# Altium PCB PCB.PcbDoc (part 2 of 2)
Units mil, origin at the board's own origin, x right, y up, seen from the top; angles counter-clockwise.
Board outline 2112 x 1014.5 mil, 4 copper layers (Top Layer, Layer 1, Layer 2, Bottom Layer), stack 36.268 mil thick; 50 components, 39 nets, 226 pads, 302 vias.
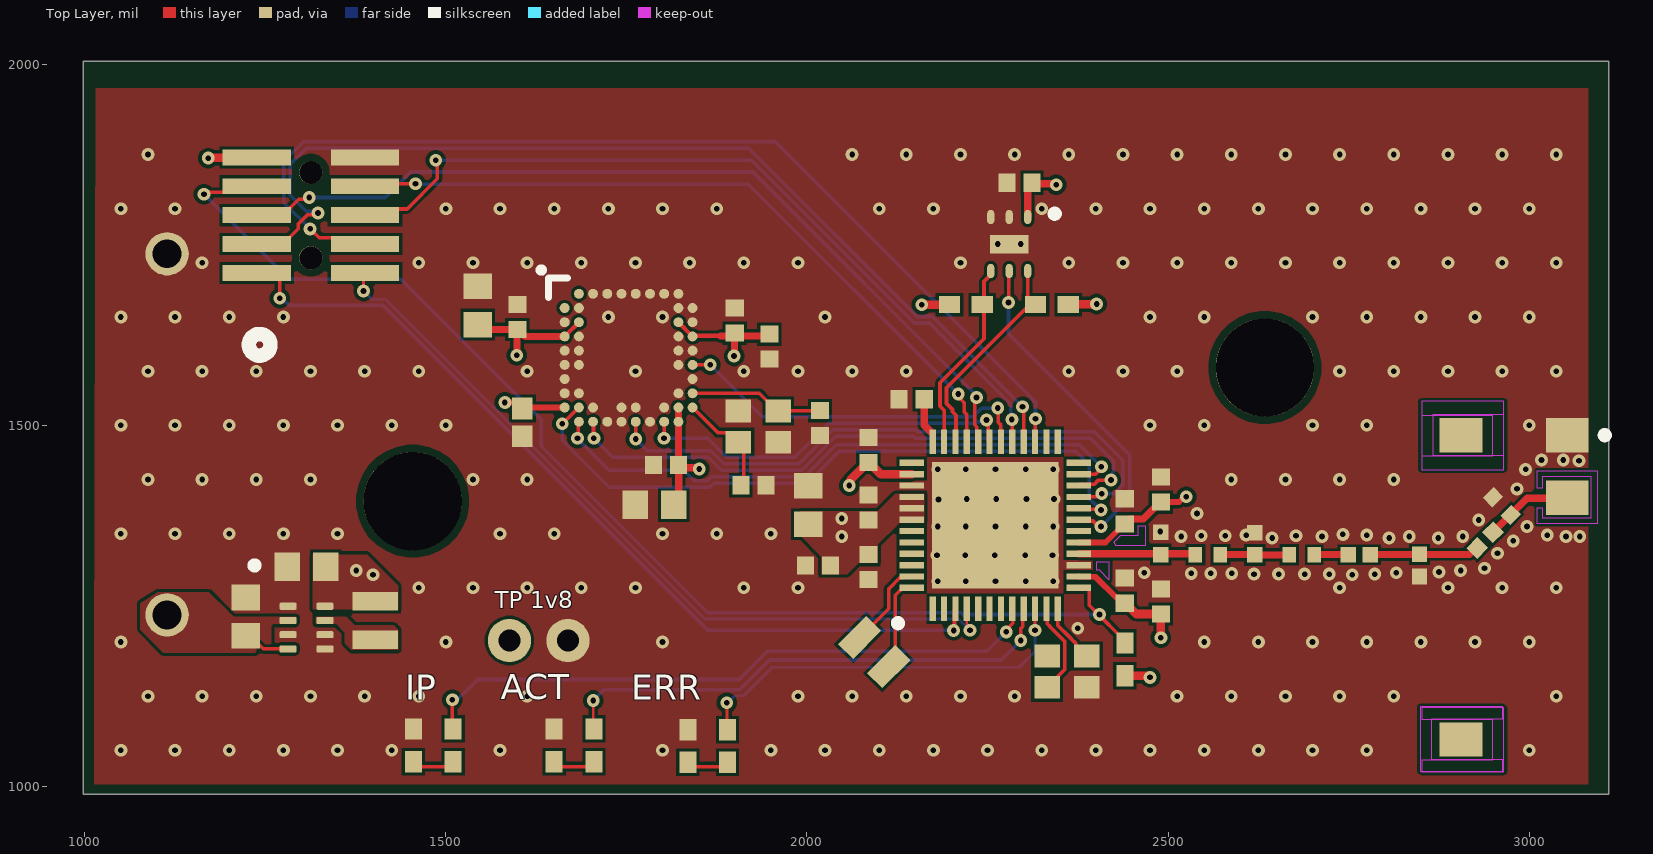
[diagram p0: Top Layer view]

## Via types
v1: diameter 17.72, hole 7.87, Top Layer to Bottom Layer, tented both sides, 300 vias
v2: diameter 19.68, hole 7.87, Top Layer to Bottom Layer, 2 vias

## Nets (pads, with @x,y where several pads share a name; then routed paths per layer and width w, separated by ;. In a path a pad name is that pad's centre, name@x,y a point inside that pad or via, vN(x,y) a via of type N, cw(c..) or ccw(c..) an arc to the next point about the centre after c; other vN are vias at no path point) (continued)
nRST: (continued)
  Top Layer w5: v1(1165,1820) 1168.44,1820 1170.92,1822.48 1224.48,1822.48 J1.4@1235,1833 ; U1.13 2388.78,1274.94 2390.61,1273.11 2390.61,1250.98 v1@2403.59,1238 ; v1(2405,1238) v1@2403.59,1238 ; R6.2@2435,1201 2435,1206.59 v1@2403.59,1238
  Bottom Layer w5: v1(1165,1820) 1282.64,1702.36 1437.78,1702.36 1632,1508.13 1632,1471 1862.5,1240.5 2213.5,1240.5 2216,1238 v1(2405,1238)
OPT_INT: U1.19 U2.5 | length 475.1
  Top Layer w5: v1(2279,1670) 2279.5,1670.5 2279.5,1713.1 U2.5 ; U1.19 2378.01,1367.59 2395.96,1367.59 2403.56,1360 v1(2407,1360)
  Bottom Layer w5: v1(2279,1670) 2279,1627 2447,1459 2447,1399.58 2407.42,1360 v1(2407,1360)
PTI_DATA: J1.6 U1.4 | length 1082.6
  Top Layer w4: J1.6@1382,1710 1386,1706 v1(1386,1686) ; 2221.26,1224.43 U1.4@2221.26,1240.26 ; U1.4 U1.4@2221.26,1240.26 ; U1.4@2222,1241 U1.4@2221.26,1240.26
  Bottom Layer w4: v1(1386,1686) 1397.5,1674.5 1416.39,1674.5 1858.89,1232 2209.98,1232 v1(2225.71,1216.26)
PTI_FRAME: J1.1 U1.3 | length 1217.2
  Top Layer w5: J1.1 1261.48,1711 1270,1702.48 1270,1680 v1@1265,1675 ; v1(2203,1216) v1@2204.26,1217.26 ; v1@2204.26,1219.26 2204.26,1244.74 U1.3
  Bottom Layer w5: v1(1270,1676) 1273.13,1676 1283.13,1666 1401.55,1666 ; 1402,1666 1412.87,1666 1862.87,1216 v1(2203,1216)
RX: J1.9 U1.33 | length 1018.5
  Top Layer w5: J1.9@1382,1834 1382.36,1834.36 v1(1458,1834.36) ; v1(2209.45,1543.25) 2209.45,1539.81 2217.82,1531.43 2217.82,1518.52 2221.26,1515.08 U1.33
  Bottom Layer w5: v1(1458,1834.36) 1458.36,1834 1918.7,1834 2208.7,1544 v1@2209,1544
SWCLK: J1.7 U1.27 | length 1448.6
  Top Layer w5: v1@1315,1773 1315,1769 1324.48,1759.52 1379.48,1759.52 J1.7 ; U1.27 2316.05,1477.41 2316.05,1508.69 v1(2316.36,1509)
  Bottom Layer w5: v1(1312,1772) 1275.66,1808.34 1275.66,1865.52 1302.57,1892.43 1956.7,1892.43 2314,1535.13 2314,1533 ; v1(2316.36,1509) 2316.36,1532.78
SWDIO: J1.2 U1.28 | length 1426.3
  Top Layer w5: J1.2@1231,1749 1272.22,1749 1295.59,1772.37 1295.59,1778.72 1308.43,1791.57 1320.57,1791.57 v1(1323,1794) ; v1(2298.49,1525.6) 2300,1524.09 U1.28
  Bottom Layer w5: v1(1323,1794) 1320.57,1796.43 1306.69,1796.43 1284.66,1818.47 1284.66,1861.79 1306.3,1883.43 1919.43,1883.43 2152.22,1650.64 2173.45,1650.64 v1(2298.49,1525.6)
SWO: J1.8 U1.29 | length 1142
  Top Layer w5: J1.8 1396.52,1799.52 1446.3,1799.52 1488,1841.22 1488,1870 v1@1487,1871 ; v1(2283.64,1508) 2283.95,1507.69 2283.95,1477.41 U1.29
  Bottom Layer w5: v1(1486,1867.07) 1812.06,1867.07 ; 1810,1867 1923.14,1867 2148.5,1641.64 2169.49,1641.64 2282.13,1529 2282.13,1509.51 v1(2283.64,1508)
TX: J1.3 U1.32 | length 1215.5
  Top Layer w5: J1.3@1239,1792 1275.22,1792 1296.21,1812.99 1308.41,1812.99 v1(1310.84,1815.42) ; v1(2234.8,1538.57) 2232.37,1536.14 2232.37,1528.92 2232.14,1528.7 2232.14,1500.62 2235.18,1497.58 2235.18,1478.93 U1.32
  Bottom Layer w5: v1(1310.84,1815.42) 1415.93,1815.42 1451.22,1850.72 1925.12,1850.72 2235,1540.83 v1@2235,1539 ; v1(2234.8,1538.57) v1@2234.8,1539
VIN: B1.1 C24.2 U4.2 U4.4 | length 60.4
  Top Layer w5: C24.2@1225,1208.39 C24.2@1225,1209 ; C24.2@1229,1208.39 1246.92,1190.47 U4.4
pads on no net: ANT1.3 ANT1.4 B1.3 B1.4 J1.11 J1.12 U1.1 U1.2 U1.5 U1.6 U1.7 U1.18 U1.24 U1.25 U1.26 U1.37 U1.43 U1.44 U1.45 U1.46 U3.A2 U3.B1 Y1.4

## Polygon pours and split planes (outlines as drawn)
GND on Top Layer "GND_L01_P004" (solid, pour order 4): 1015.55,1974.45 3098.55,1974.45 3098.55,995.45 3096.55,993.45 1012.55,993.45
1V8 on Top Layer "1V8_L01_P000" (solid, pour order 0): 2162,1405 2122,1405 2098,1381 1991,1381 1989,1379 1989,1349 2020,1318 2020,1294 2056,1294 2072,1310 2098,1310 2098,1335 2129,1366 2162,1366 2162,1367
NetL3_1 on Top Layer "NETL3_1_L01_P003" (solid, pour order 3): 1320,1235 1362,1235 1374,1223 1428,1223 1434,1217 1434,1189 1369,1189 1360,1198 1360,1213 1348,1225 1320,1225
1V8 on Top Layer "1V8_L01_P002" (solid, pour order 2): 1316,1321 1391,1321 1434,1278 1434,1245 1316,1245
VIN on Top Layer "VIN" (solid, pour order 1): 1077,1253.82 1100.86,1269 1172,1269 1206,1235 1293,1235 1293,1226 1292,1225 1261,1225 1258,1222 1258,1198 1245,1185 1109,1185 1077,1217
1V8 on Layer 2 "1V8_L03_P007" (solid, pour order 7): 1006.5,1977.5 3080.5,1977.5 2537.5,1434.5 2537.5,1005.5 1007.5,1005.5 1006.5,1006.5
GND on Layer 1 "GND_L02_P005" (solid, pour order 5): 1011.14,1976.24 3090.14,1976.24 3089.14,1975.24 3089.14,998.24 1012.14,998.24 1011.14,999.24
GND on Bottom Layer "GND_L04_P008" (solid, pour order 8): 1010.14,1973.24 3093.14,1973.24 3093.14,998.24 3089.14,1002.24 1010.14,1002.24

## Keep-outs
Top Layer:
  region: 2851,1438.5 2965,1438.5 2965,1533.5 2851,1533.5 2851,1514 2949,1514 2949,1457 2851,1457
  region: 2851,1020 2965,1020 2965,1109 2851,1109 2851,1093 2949,1093 2949,1036 2851,1036
  region: 2425,1338 2426,1336 2427,1334 2469,1334 2469,1360 2467,1360 2458,1360 2458,1347 2434,1347
  region: 2401,1299 2401,1311 2418,1311 2418,1286 2405,1299
  region: 2965,1533.5 2851,1533.5 2851,1438.5 2965,1438.5 2965,1458 2867,1458 2867,1515 2965,1515
  region: 3011,1386 3018,1386 3018,1372 3086,1372 3086,1429 3018,1429 3018,1413 3011,1413 3011,1437 3094,1437 3094,1364 3011,1364
  region: 2963,1110 2849,1110 2849,1021 2963,1021 2963,1037 2865,1037 2865,1094 2963,1094
Layer 1:
  rectangle: 2847.07,1017.9 2961.07,1112.9
  rectangle: 2849,1442 2963,1531
  rectangle: 3011,1363 3094,1436
Layer 2:
  rectangle: 2847.07,1017.9 2961.07,1112.9
  rectangle: 2848,1442 2962,1531
  rectangle: 3011,1364 3094,1437
Bottom Layer:
  rectangle: 2847.07,1017.9 2961.07,1112.9
  rectangle: 2849,1442 2963,1531
  rectangle: 3011,1363 3094,1436

## Silkscreen, mask and mechanical layers (free items; w line width, h text height)
Top Overlay:
  lines w10: 1642,1677 1642,1704 ; 1643,1704 1668,1704
  text "TP 1v8" at 1568,1239.44 h40
  text "ACT" at 1576,1108.67 h60
  text "IP" at 1444,1108 h60
  text "ERR" at 1757,1108 h60
Top Solder:
  text "IPR v2" at 1634,1845.33 h120